# EAGLE board AC-DC 5V regulator (EAGLE 9.6.2)
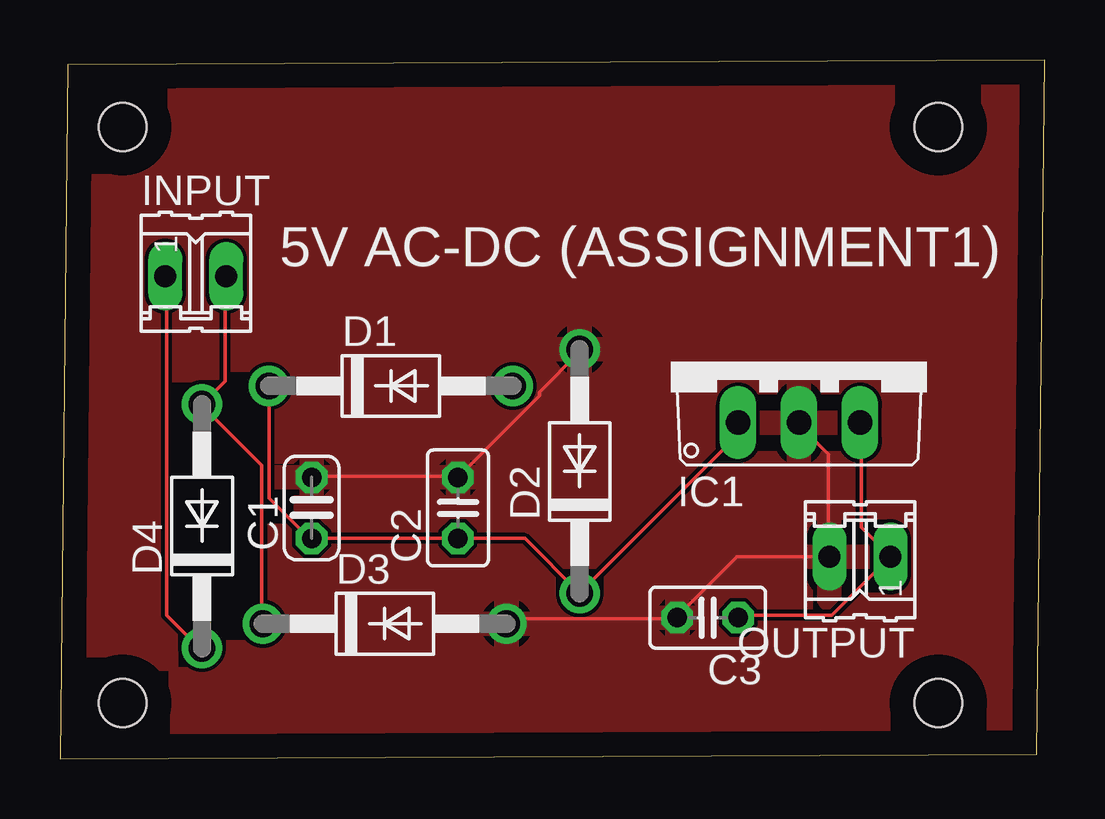
[diagram p0: board, top side]
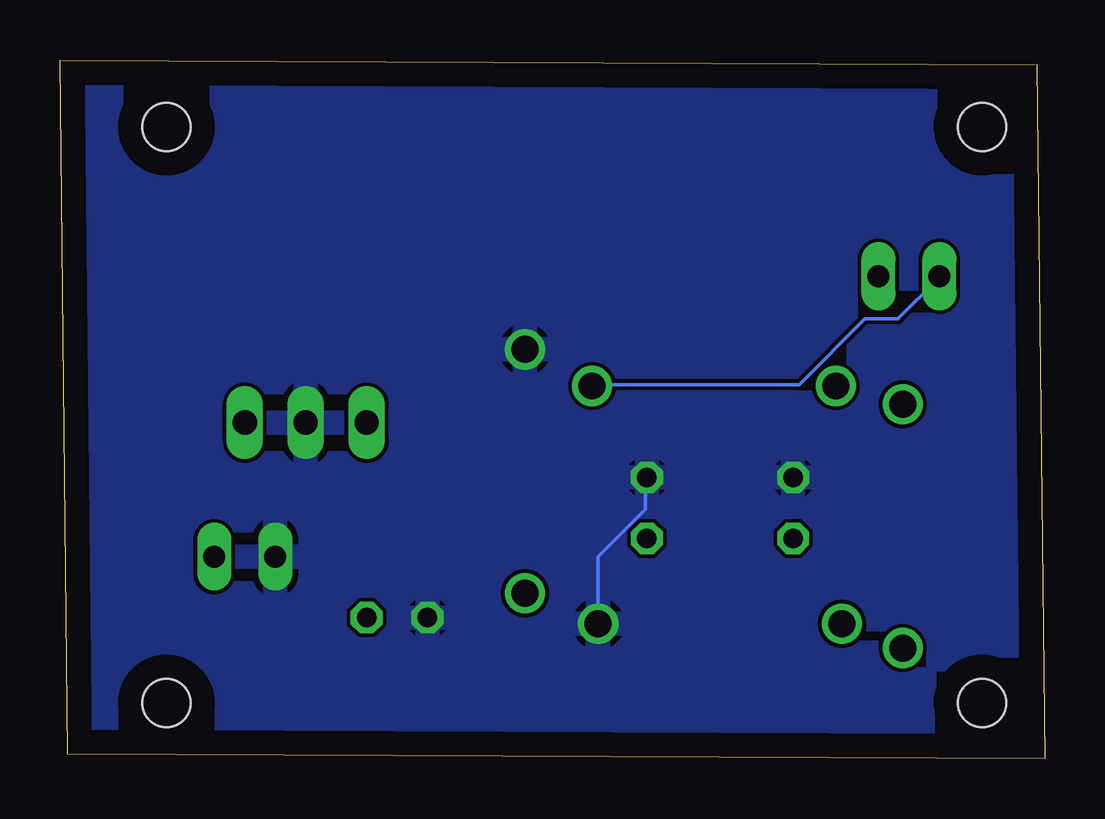
[diagram p1: board, bottom side, seen from below]

Size 41.05 x 29.12 mm. Coordinates in mm from the lower left corner, seen from the top.
Outline: 0,0 40.72,0.2 41.05,29.12 0.33,28.92 0,0
Copper layers (1*16): Top 0.035mm / dielectric 1.5mm / Bottom 0.035mm
Design rules "default": minimum track width 6mil, minimum drill 0.35mm, track to track 6mil, track to pad 6mil, pad to pad 6mil, via to via 6mil, smd to smd 6mil, copper to edge 40mil, drill to drill 6mil, minimum pad ring 10mil, minimum via ring 8mil, stop-mask expansion 4mil, vias tented up to drill 0mil, thermal gap 10mil
Holes 2 mm at 2.62,26.33 36.62,26.33 36.62,2.33 2.62,2.33

## Footprints (pad centres in the part's own frame; a part is rotated, then mirrored left to right if it is on the bottom)
C025-024X044 = drill 0.813 octagon: 1 -1.27,0; 2 1.27,0
C025-025X050 = drill 0.813 octagon: 1 -1.27,0; 2 1.27,0
DO41-10 = drill 1.118: A 5.08,0; C -5.08,0
TO220V = drill 1.016 long: 1 -2.54,-2.54; 2 0,-2.54; 3 2.54,-2.54
02P = drill 0.914 long: 1 -1.27,0; 2 1.27,0

## Placement (x,y rotation side)
C1  1000uF  [C025-024X044]  10.49,10.46 90 top
C2  0.1uF  [C025-025X050]  16.59,10.46 90 top
C3  0.1uF  [C025-025X050]  27,5.89 180 top
D1  1N4007  [DO41-10]  13.79,15.54 0 top
D2  1N4007  [DO41-10]  21.67,11.98 90 top
D3  1N4007  [DO41-10]  13.54,5.63 0 top
D4  1N4007  [DO41-10]  5.92,9.7 90 top
IC1  LM7805  [TO220V]  30.81,16.55 0 top
INPUT  [02P]  5.66,20.11 0 top
OUTPUT  [02P]  33.35,8.43 180 top

## Library data of the parts
C1-C3 = rcl; SPICEPREFIX: C
D1-D4 = diode
IC1 = linear
INPUT OUTPUT = con-amp-quick; OC_FARNELL: unknown; OC_NEWARK: unknown

## Nets
GND: C1.2 C2.2 C3.2 D2.A D3.A IC1.2 OUTPUT.2
N$1: D1.A D4.C INPUT.1
N$2: D3.C D4.A INPUT.2
N$3: C1.1 C2.1 D1.C D2.C IC1.1
N$4: C3.1 IC1.3 OUTPUT.1

## Tracks (layer width: path | path; a pad name or v marks a point on that pad's centre or on a via)
GND
  Top 0.152: C1.2 10.54,11.78 16.48,11.78 C2.2 19.99,15.13 19.99,15.28 21.67,16.96 D2.A | 32.03,8.43 32.03,12.69 30.81,13.91 IC1.2 | D3.A 18.62,5.68 18.77,5.84 25.63,5.84 C3.2 25.78,5.99 28.22,8.43 32.03,8.43 | 32.03,8.43 OUTPUT.2
  Bottom 0.152: D3.A 18.62,8.43 16.64,10.41 16.64,11.63 C2.2
  pour Top: -1.38,30.33 42.62,30.33 42.62,-1.67 -1.38,-1.67
  pour Bottom: -3.38,32.33 44.62,32.33 44.62,-3.67 -3.38,-3.67 -3.38,30.33
N$1
  Top 0.152: INPUT.1 4.45,20.01 4.45,5.99 5.82,4.62 D4.C
  Bottom 0.152: D1.A 18.77,15.59 10.24,15.59 7.49,18.33 6.12,18.33 4.45,20.01 INPUT.1
N$2
  Top 0.152: INPUT.2 6.88,20.01 6.88,15.74 D4.A 5.97,14.67 8.41,12.24 8.41,5.68 D3.C
N$3
  Top 0.152: D1.C 8.71,10.86 10.39,9.19 C1.1 C2.1 19.38,9.19 D2.C 28.22,13.46 28.22,13.91 IC1.1
N$4
  Top 0.152: C3.1 28.37,5.99 32.18,5.99 OUTPUT.1 33.4,9.65 33.4,13.91 IC1.3

## Text on the board
tNames: 5V AC-DC (ASSIGNMENT1)